# EAGLE board USB-FTDI-ESPmulti (EAGLE 9.6.0)
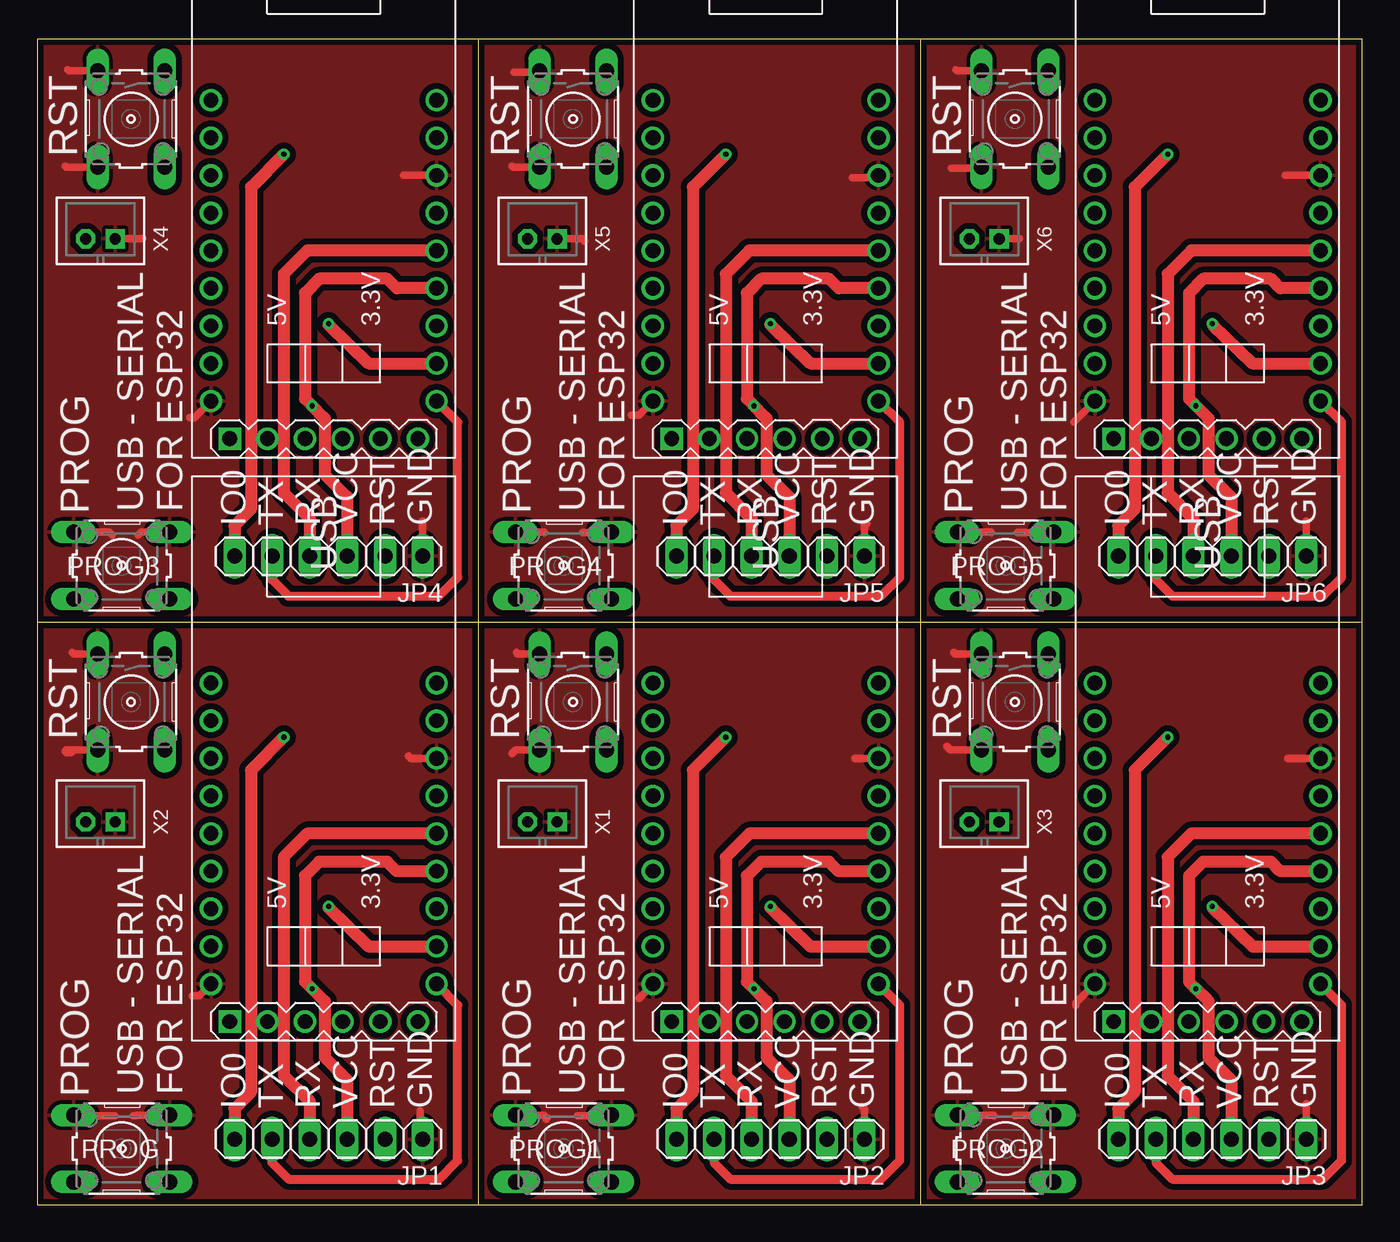
[diagram p0: board, top side]
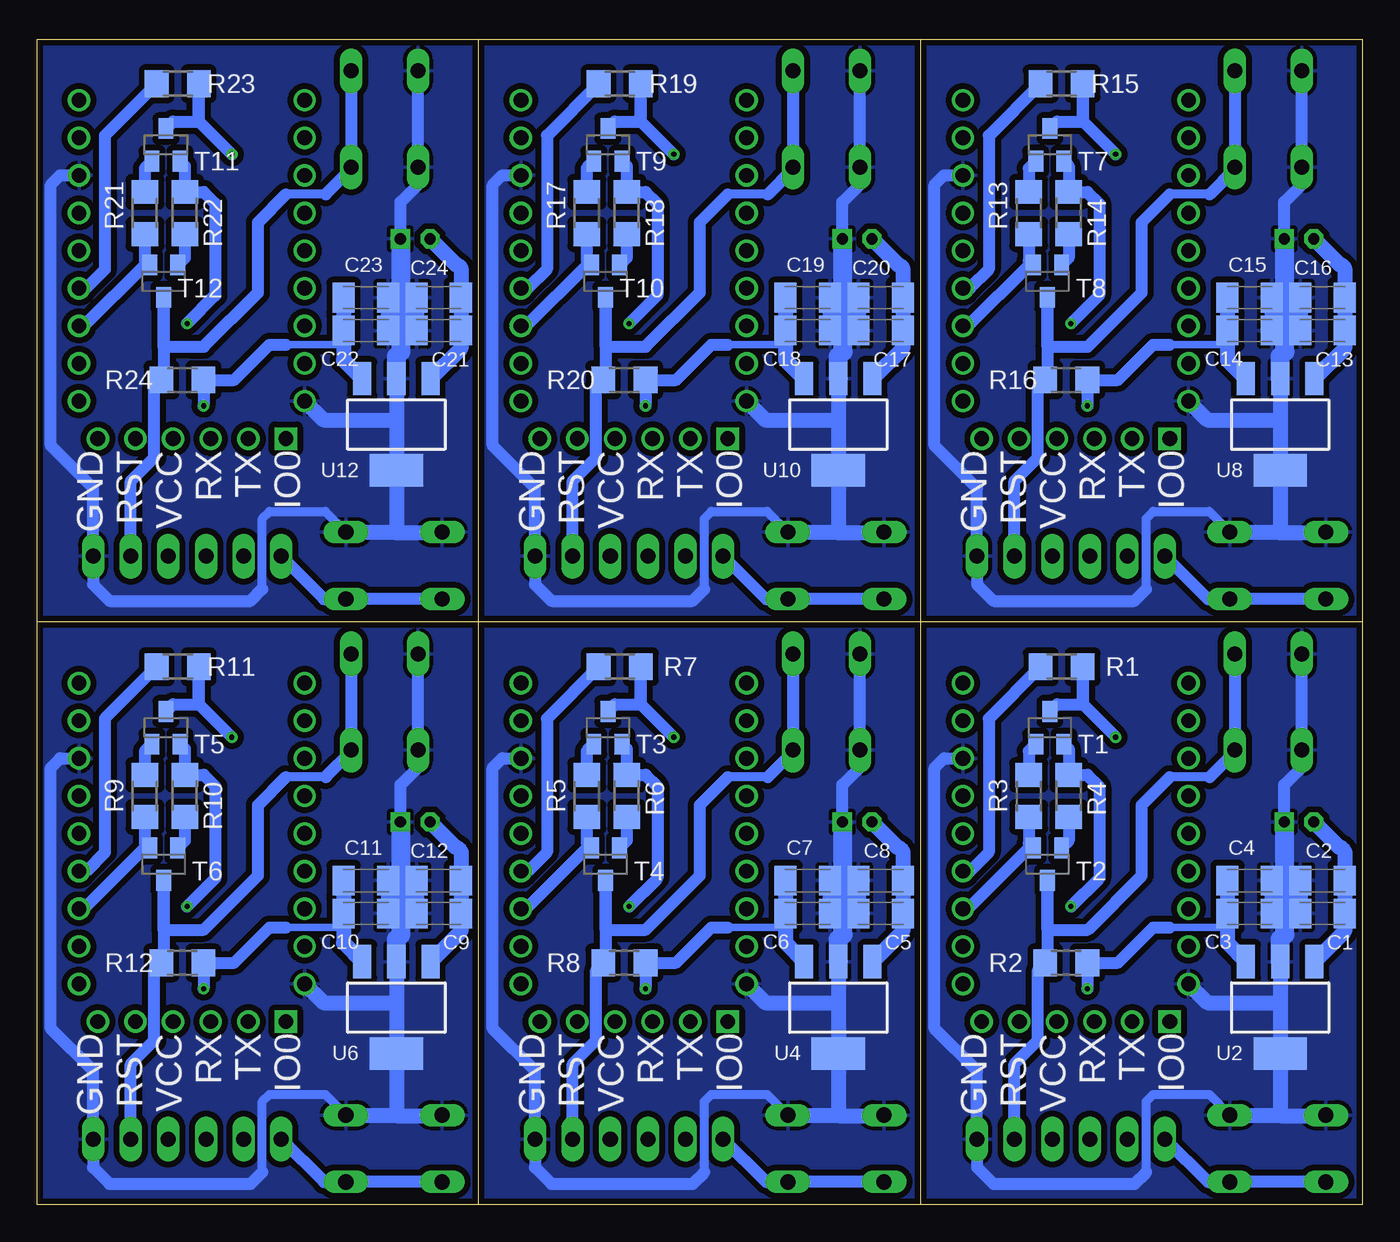
[diagram p1: board, bottom side, seen from below]

Size 89.52 x 78.73 mm. Coordinates in mm from the lower left corner, seen from the top.
Outline: 29.84,0 29.84,78.73
Outline: 59.68,0 59.68,78.73
Outline: 0,39.36 89.52,39.36
Outline: 0,78.73 0,0 89.52,0 89.52,78.73 0,78.73
Copper layers (1*16): Top 0.035mm / dielectric 1.5mm / Bottom 0.035mm
Design rules "default *": minimum track width 6mil, minimum drill 0.35mm, track to track 6mil, track to pad 6mil, pad to pad 6mil, via to via 6mil, smd to smd 6mil, copper to edge 6mil, drill to drill 6mil, minimum pad ring 10mil, minimum via ring 8mil, stop-mask expansion 4mil, vias tented up to drill 0mil, thermal gap 10mil

## Footprints (pad centres in the part's own frame; a part is rotated, then mirrored left to right if it is on the bottom)
C1206K = smd 1.5 x 2: 1 -1.5,0; 2 1.5,0
1X06 = drill 1.016 long: 1 -6.35,0; 2 -3.81,0; 3 -1.27,0; 4 1.27,0; 5 3.81,0; 6 6.35,0
B3F-10XX = drill 1.016 long: 1 -3.251,2.261; 2 3.251,2.261; 3 -3.251,-2.261; 4 3.251,-2.261
R1206 = smd 1.6 x 1.803: 1 -1.422,0; 2 1.422,0
SOT23-BEC = smd 1 x 1.4: B -0.95,-1.1; C 0,1.1; E 0.95,-1.1
USB-SERIAL-FT232R-3.3-5 = drill 1: 3.3 -8.89,7.62; 5V -11.43,7.62; CTS -6.35,7.62; CTS2 -21.59,-3.81; DCD 1.27,-7.62; DSR -1.27,-7.62; DTR -16.51,-7.62; GND -3.81,-7.62; GND2 -21.59,-6.35; GND3 -19.05,7.62; PWREN 1.27,7.62; RI -6.35,-7.62; RTS -13.97,-7.62; RX -8.89,-7.62; RX2 -21.59,3.81; RXL -13.97,7.62; SLEEP -3.81,7.62; TX -19.05,-7.62; TX2 -21.59,1.27; TXDEN -1.27,7.62; TXL -16.51,7.62; VCC -11.43,-7.62; VCC2 -21.59,-1.27 | drill 1 square: DTR2 -21.59,6.35
SOT223 = smd 1.219 x 2.235: 1 -2.311,-3.099; 2 0,-3.099; 3 2.311,-3.099 | smd 3.6 x 2.2: 4 0,3.099
B2B-PH-K-S = drill 0.75 pad 1.3 square: 1 1,0 | drill 0.75 pad 1.3 octagon: 2 -1,0

## Placement (x,y rotation side)
C1  [C1206K]  2.7,19.68 180 bottom
C2  [C1206K]  2.7,21.91 180 bottom
C3  [C1206K]  7.62,19.68 0 bottom
C4  [C1206K]  7.62,21.91 0 bottom
C5  [C1206K]  32.54,19.68 180 bottom
C6  [C1206K]  37.47,19.68 0 bottom
C7  [C1206K]  37.47,21.91 0 bottom
C8  [C1206K]  32.54,21.91 180 bottom
C9  [C1206K]  62.39,19.68 180 bottom
C10  [C1206K]  67.31,19.68 0 bottom
C11  [C1206K]  67.31,21.91 0 bottom
C12  [C1206K]  62.39,21.91 180 bottom
C13  [C1206K]  2.7,59.05 180 bottom
C14  [C1206K]  7.62,59.05 0 bottom
C15  [C1206K]  7.62,61.28 0 bottom
C16  [C1206K]  2.7,61.28 180 bottom
C17  [C1206K]  32.54,59.05 180 bottom
C18  [C1206K]  37.47,59.05 0 bottom
C19  [C1206K]  37.47,61.28 0 bottom
C20  [C1206K]  32.54,61.28 180 bottom
C21  [C1206K]  62.39,59.05 180 bottom
C22  [C1206K]  67.31,59.05 0 bottom
C23  [C1206K]  67.31,61.28 0 bottom
C24  [C1206K]  62.39,61.28 180 bottom
JP1  [1X06]  19.68,4.45 180 top
JP2  [1X06]  49.53,4.45 180 top
JP3  [1X06]  79.38,4.45 180 top
JP4  [1X06]  19.68,43.81 180 top
JP5  [1X06]  49.53,43.81 180 top
JP6  [1X06]  79.38,43.81 180 top
PROG  [B3F-10XX]  5.71,3.81 180 top
PROG1  [B3F-10XX]  35.56,3.81 180 top
PROG2  [B3F-10XX]  65.41,3.81 180 top
PROG3  [B3F-10XX]  5.71,43.18 180 top
PROG4  [B3F-10XX]  35.56,43.18 180 top
PROG5  [B3F-10XX]  65.41,43.18 180 top
R1  100k  [R1206]  20.32,36.35 180 bottom
R2  100k  [R1206]  20,16.35 0 bottom
R3  10k  [R1206]  22.54,27.62 90 bottom
R4  10k  [R1206]  19.84,27.62 270 bottom
R5  10k  [R1206]  52.39,27.62 90 bottom
R6  10k  [R1206]  49.69,27.62 270 bottom
R7  100k  [R1206]  50.16,36.35 180 bottom
R8  100k  [R1206]  49.85,16.35 0 bottom
R9  10k  [R1206]  82.23,27.62 90 bottom
R10  10k  [R1206]  79.53,27.62 270 bottom
R11  100k  [R1206]  80.01,36.35 180 bottom
R12  100k  [R1206]  79.69,16.35 0 bottom
R13  10k  [R1206]  22.54,66.99 90 bottom
R14  10k  [R1206]  19.84,66.99 270 bottom
R15  100k  [R1206]  20.32,75.72 180 bottom
R16  100k  [R1206]  20,55.72 0 bottom
R17  10k  [R1206]  52.39,66.99 90 bottom
R18  10k  [R1206]  49.69,66.99 270 bottom
R19  100k  [R1206]  50.16,75.72 180 bottom
R20  100k  [R1206]  49.85,55.72 0 bottom
R21  10k  [R1206]  82.23,66.99 90 bottom
R22  10k  [R1206]  79.53,66.99 270 bottom
R23  100k  [R1206]  80.01,75.72 180 bottom
R24  100k  [R1206]  79.69,55.72 0 bottom
RST  [B3F-10XX]  6.35,33.97 270 top
RST1  [B3F-10XX]  36.2,33.97 270 top
RST2  [B3F-10XX]  66.04,33.97 270 top
RST3  [B3F-10XX]  6.35,73.34 270 top
RST4  [B3F-10XX]  36.2,73.34 270 top
RST5  [B3F-10XX]  66.04,73.34 270 top
T1  2222  [SOT23-BEC]  21.11,32.23 0 bottom
T2  2222  [SOT23-BEC]  21.27,23.02 180 bottom
T3  2222  [SOT23-BEC]  50.96,32.23 0 bottom
T4  2222  [SOT23-BEC]  51.12,23.02 180 bottom
T5  2222  [SOT23-BEC]  80.8,32.23 0 bottom
T6  2222  [SOT23-BEC]  80.96,23.02 180 bottom
T7  2222  [SOT23-BEC]  21.11,71.6 0 bottom
T8  2222  [SOT23-BEC]  21.27,62.39 180 bottom
T9  2222  [SOT23-BEC]  50.96,71.6 0 bottom
T10  2222  [SOT23-BEC]  51.12,62.39 180 bottom
T11  2222  [SOT23-BEC]  80.8,71.6 0 bottom
T12  2222  [SOT23-BEC]  80.96,62.39 180 bottom
U1  USB-SERIAL-FT232R-3.3-5  [USB-SERIAL-FT232R-3.3-5]  19.37,33.97 90 top
U2  MIC5239S  [SOT223]  5.56,13.34 180 bottom
U3  USB-SERIAL-FT232R-3.3-5  [USB-SERIAL-FT232R-3.3-5]  49.21,33.97 90 top
U4  MIC5239S  [SOT223]  35.4,13.34 180 bottom
U5  USB-SERIAL-FT232R-3.3-5  [USB-SERIAL-FT232R-3.3-5]  79.06,33.97 90 top
U6  MIC5239S  [SOT223]  65.25,13.34 180 bottom
U7  USB-SERIAL-FT232R-3.3-5  [USB-SERIAL-FT232R-3.3-5]  19.37,73.34 90 top
U8  MIC5239S  [SOT223]  5.56,52.7 180 bottom
U9  USB-SERIAL-FT232R-3.3-5  [USB-SERIAL-FT232R-3.3-5]  49.21,73.34 90 top
U10  MIC5239S  [SOT223]  35.4,52.7 180 bottom
U11  USB-SERIAL-FT232R-3.3-5  [USB-SERIAL-FT232R-3.3-5]  79.06,73.34 90 top
U12  MIC5239S  [SOT223]  65.25,52.7 180 bottom
X1  B2B-PH-K-S  [B2B-PH-K-S]  34.13,25.88 0 top
X2  B2B-PH-K-S  [B2B-PH-K-S]  4.29,25.88 0 top
X3  B2B-PH-K-S  [B2B-PH-K-S]  63.98,25.88 0 top
X4  B2B-PH-K-S  [B2B-PH-K-S]  4.29,65.25 0 top
X5  B2B-PH-K-S  [B2B-PH-K-S]  34.13,65.25 0 top
X6  B2B-PH-K-S  [B2B-PH-K-S]  63.98,65.25 0 top

## Library data of the parts
C1-C24 = rcl; SPICEPREFIX: C
JP1-JP6 = pinhead
PROG PROG1-PROG5 RST RST1-RST5 = switch-omron; MPN: B3F-1000; OC_FARNELL: 176432; OC_NEWARK: 36M3542
R1-R24 = eagle-ltspice; SPICEMODEL: NONE; SPICEPREFIX: R
T1-T12 = transistor
U1 U3 U5 U7 U9 U11 = diy-modules1.8-perso
U2 U4 U6 U8 U10 U12 = micrel
X1-X6 = con-JST PH

## Nets
DTR: R4.1 T1.E U1.DTR
DTR1: R6.1 T3.E U3.DTR
DTR2: R10.1 T5.E U5.DTR
DTR3: R14.1 T7.E U7.DTR
DTR4: R18.1 T9.E U9.DTR
DTR5: R22.1 T11.E U11.DTR
GND: C1.2 C2.2 C3.2 C4.2 JP1.1 PROG.3 PROG.4 RST.3 RST.4 U1.GND U1.GND3 U2.2 U2.4 X2.1
GND1: C5.2 C6.2 C7.2 C8.2 JP2.1 PROG1.3 PROG1.4 RST1.3 RST1.4 U3.GND U3.GND3 U4.2 U4.4 X1.1
GND2: C9.2 C10.2 C11.2 C12.2 JP3.1 PROG2.3 PROG2.4 RST2.3 RST2.4 U5.GND U5.GND3 U6.2 U6.4 X3.1
GND3: C13.2 C14.2 C15.2 C16.2 JP4.1 PROG3.3 PROG3.4 RST3.3 RST3.4 U7.GND U7.GND3 U8.2 U8.4 X4.1
GND4: C17.2 C18.2 C19.2 C20.2 JP5.1 PROG4.3 PROG4.4 RST4.3 RST4.4 U9.GND U9.GND3 U10.2 U10.4 X5.1
GND5: C21.2 C22.2 C23.2 C24.2 JP6.1 PROG5.3 PROG5.4 RST5.3 RST5.4 U11.GND U11.GND3 U12.2 U12.4 X6.1
IO0: JP1.6 PROG.1 PROG.2 R1.1 T1.C
IO1: JP2.6 PROG1.1 PROG1.2 R7.1 T3.C
IO2: JP3.6 PROG2.1 PROG2.2 R11.1 T5.C
IO3: JP4.6 PROG3.1 PROG3.2 R15.1 T7.C
IO4: JP5.6 PROG4.1 PROG4.2 R19.1 T9.C
IO5: JP6.6 PROG5.1 PROG5.2 R23.1 T11.C
N$1: C1.1 C2.1 U2.1 X2.2
N$2: R5.2 T3.B
N$3: R6.2 T4.B
N$4: C5.1 C8.1 U4.1 X1.2
N$5: R9.2 T5.B
N$6: R10.2 T6.B
N$7: C9.1 C12.1 U6.1 X3.2
N$8: R13.2 T7.B
N$9: R14.2 T8.B
N$10: R3.2 T1.B
N$11: C13.1 C16.1 U8.1 X4.2
N$12: R17.2 T9.B
N$13: R18.2 T10.B
N$14: R4.2 T2.B
N$15: C17.1 C20.1 U10.1 X5.2
N$16: R21.2 T11.B
N$17: R22.2 T12.B
N$18: C21.1 C24.1 U12.1 X6.2
RST: JP1.2 R2.1 RST.1 RST.2 T2.C
RST1: JP2.2 R8.1 RST1.1 RST1.2 T4.C
RST2: JP3.2 R12.1 RST2.1 RST2.2 T6.C
RST3: JP4.2 R16.1 RST3.1 RST3.2 T8.C
RST4: JP5.2 R20.1 RST4.1 RST4.2 T10.C
RST5: JP6.2 R24.1 RST5.1 RST5.2 T12.C
RTS: R3.1 T2.E U1.RTS
RTS1: R5.1 T4.E U3.RTS
RTS2: R9.1 T6.E U5.RTS
RTS3: R13.1 T8.E U7.RTS
RTS4: R17.1 T10.E U9.RTS
RTS5: R21.1 T12.E U11.RTS
RX: JP1.4 U1.RX
RX1: JP2.4 U3.RX
RX2: JP3.4 U5.RX
RX3: JP4.4 U7.RX
RX4: JP5.4 U9.RX
RX5: JP6.4 U11.RX
TX: JP1.5 U1.TX
TX1: JP2.5 U3.TX
TX2: JP3.5 U5.TX
TX3: JP4.5 U7.TX
TX4: JP5.5 U9.TX
TX5: JP6.5 U11.TX
VCC: C3.1 C4.1 JP1.3 R1.2 R2.2 U1.VCC U2.3
VCC1: C6.1 C7.1 JP2.3 R7.2 R8.2 U3.VCC U4.3
VCC2: U1.VCC2
VCC3: U3.VCC2
VCC4: C10.1 C11.1 JP3.3 R11.2 R12.2 U5.VCC U6.3
VCC5: U5.VCC2
VCC6: C14.1 C15.1 JP4.3 R15.2 R16.2 U7.VCC U8.3
VCC7: U7.VCC2
VCC8: C18.1 C19.1 JP5.3 R19.2 R20.2 U9.VCC U10.3
VCC9: U9.VCC2
VCC10: C22.1 C23.1 JP6.3 R23.2 R24.2 U11.VCC U12.3
VCC11: U11.VCC2

## Tracks (layer width: path | path; a pad name or v marks a point on that pad's centre or on a via)
DTR  (via drill 0.35)
  Top 0.152: v19.68,20.16 19.68,20.09 | 19.68,20.09
  Top 0.813: 19.68,20.09 22.41,17.46 U1.DTR
  Bottom 0.813: T1.E 19.84,30.81 R4.1 18.57,29.04 17.78,28.26 17.78,22.07 v19.68,20.16
DTR1  (via drill 0.35)
  Top 0.152: v49.53,20.16 49.53,20.09 | 49.53,20.09
  Top 0.813: 49.53,20.09 52.25,17.46 U3.DTR
  Bottom 0.813: T3.E 49.69,30.81 R6.1 48.41,29.04 47.62,28.26 47.62,22.07 v49.53,20.16
DTR2  (via drill 0.35)
  Top 0.152: v79.38,20.16 79.38,20.09 | 79.38,20.09
  Top 0.813: 79.38,20.09 82.1,17.46 U5.DTR
  Bottom 0.813: T5.E 79.53,30.81 R10.1 78.26,29.04 77.47,28.26 77.47,22.07 v79.38,20.16
DTR3  (via drill 0.35)
  Top 0.152: v19.68,59.53 19.68,59.46 | 19.68,59.46
  Top 0.813: 19.68,59.46 22.41,56.83 U7.DTR
  Bottom 0.813: T7.E 19.84,70.18 R14.1 18.57,68.42 17.78,67.63 17.78,61.44 v19.68,59.53
DTR4  (via drill 0.35)
  Top 0.152: v49.53,59.53 49.53,59.46 | 49.53,59.46
  Top 0.813: 49.53,59.46 52.25,56.83 U9.DTR
  Bottom 0.813: T9.E 49.69,70.18 R18.1 48.41,68.42 47.62,67.63 47.62,61.44 v49.53,59.53
DTR5  (via drill 0.35)
  Top 0.152: v79.38,59.53 79.38,59.46 | 79.38,59.46
  Top 0.813: 79.38,59.46 82.1,56.83 U11.DTR
  Bottom 0.813: T11.E 79.53,70.18 R22.1 78.26,68.42 77.47,67.63 77.47,61.44 v79.38,59.53
GND
  Top 0.508: RST.3 2.46,37.22 2.38,37.31 | RST.4 1.99,30.72 1.91,30.64 1.98,30.56 2.3,30.56 2.38,30.64 | U1.GND 25.24,30.16 25.08,30.32 | U1.GND3 10.95,14.13 10.48,14.13 | PROG.4 2.5,6.03 5.24,6.03 | PROG.3 6.71,6.07 6.67,6.03 6.51,6.03 | JP1.1 25.88,4.6 25.88,6.35
  Bottom 0.61: 14.61,2.22 14.61,6.99 14.13,7.46 10.36,7.46 8.93,6.03
  Bottom 0.813: C3.2 5.96,19.53 5.24,19.53 5.08,19.68 C1.2 | C4.2 5.24,21.91 C2.2 | X2.1 5.29,28.37 3.97,29.69 3.97,30.6 RST.4 RST.3 | 14.61,2.22 15.4,1.43 24.92,1.43 26.04,2.54 JP1.1 26.04,9.05 28.89,11.91 28.89,29.53 28.26,30.16 U1.GND
  Bottom 1.016: C2.2 C1.2 | C4.2 C3.2 | U2.2 5.56,13.65 | 5.56,13.65 U2.4 5.56,6.03 | U1.GND3 10.48,13.65 5.56,13.65 | 5.56,6.03 2.5,6.03 PROG.4 | 5.56,6.03 8.93,6.03 PROG.3
  Bottom 1.27: U2.2 5.56,17.94 5.24,18.26 5.24,19.53 5.24,21.91 5.24,25.83 X2.1
  pour Top (isolate 0.406): 0,39.37 29.84,39.37 29.84,0 0,0
  pour Bottom (isolate 0.406): 0,39.37 29.84,39.37 29.84,0 0,0
GND1
  Top 0.508: U3.GND3 40.64,13.97 | RST1.3 32.47,37.22 32.38,37.31 | RST1.4 32.31,30.72 32.07,30.48 | PROG1.4 34.25,6.07 34.45,5.87 34.37,5.79 | PROG1.3 38.77,6.03 36.51,6.03 | JP2.1 55.88,6.51 55.72,6.67 | U3.GND 55.24,30.16
  Bottom 0.61: 44.45,2.22 44.45,6.99 43.97,7.46 40.2,7.46 38.77,6.03
  Bottom 0.813: C6.2 35.81,19.53 35.08,19.53 34.92,19.68 C5.2 | C7.2 35.08,21.91 C8.2 | X1.1 35.13,28.37 33.81,29.69 33.81,30.6 RST1.4 RST1.3 | 44.45,2.22 45.24,1.43 54.77,1.43 55.88,2.54 JP2.1 55.88,9.05 58.74,11.91 58.74,29.53 58.1,30.16 U3.GND
  Bottom 1.016: C8.2 C5.2 | C7.2 C6.2 | U4.2 35.4,13.65 | 35.4,13.65 U4.4 35.4,6.03 | U3.GND3 40.32,13.65 35.4,13.65 | 35.4,6.03 32.35,6.03 PROG1.4 | 35.4,6.03 38.77,6.03 PROG1.3
  Bottom 1.27: U4.2 35.4,17.94 35.08,18.26 35.08,19.53 35.08,21.91 35.08,25.83 X1.1
  pour Top (isolate 0.406): 29.84,39.37 59.69,39.37 59.69,0 29.84,0
  pour Bottom (isolate 0.406): 29.84,39.37 59.69,39.37 59.69,0 29.84,0
GND2
  Top 0.508: RST2.3 61.99,37.22 61.91,37.31 | RST2.4 61.67,30.72 61.44,30.96 | U5.GND3 70.17,13.65 70.17,13.49 | 63.66,5.87 63.46,6.07 PROG2.4 64.57,6.07 64.61,6.03 | PROG2.3 66.08,6.07 66.04,6.03 | U5.GND 84.45,30.16 | JP3.1 85.72,6.83
  Bottom 0.61: 74.3,2.22 74.3,6.99 73.82,7.46 70.05,7.46 68.62,6.03
  Bottom 0.813: C10.2 65.65,19.53 64.93,19.53 64.77,19.68 C9.2 | C11.2 64.93,21.91 C12.2 | X3.1 64.98,28.37 63.66,29.69 63.66,30.6 RST2.4 RST2.3 | 74.3,2.22 75.09,1.43 84.61,1.43 85.72,2.54 JP3.1 85.72,9.05 88.58,11.91 88.58,29.53 87.95,30.16 U5.GND
  Bottom 1.016: C12.2 C9.2 | C11.2 C10.2 | U6.2 65.25,13.65 | 65.25,13.65 U6.4 65.25,6.03 | U5.GND3 70.17,13.65 65.25,13.65 | 65.25,6.03 62.19,6.03 PROG2.4 | 65.25,6.03 68.62,6.03 PROG2.3
  Bottom 1.27: U6.2 65.25,17.94 64.93,18.26 64.93,19.53 64.93,21.91 64.93,25.83 X3.1
  pour Top (isolate 0.406): 59.69,39.37 89.53,39.37 89.53,0 59.69,0
  pour Bottom (isolate 0.406): 59.69,39.37 89.53,39.37 89.53,0 59.69,0
GND3
  Top 0.508: RST3.3 2.15,76.59 2.06,76.68 | RST3.4 1.98,70.09 1.91,70.17 | U7.GND 24.77,69.53 | PROG3.4 4.88,45.44 5.08,45.24 | PROG3.3 7.02,45.44 6.83,45.24 | U7.GND3 10.64,53.18 10.32,53.18 | JP4.1 26.04,46.2 | X4.1 7.14,65.25
  Bottom 0.61: 14.61,41.59 14.61,46.35 14.13,46.83 10.36,46.83 8.93,45.4
  Bottom 0.813: C14.2 5.96,58.9 5.24,58.9 5.08,59.05 C13.2 | C15.2 5.24,61.28 C16.2 | X4.1 5.29,67.74 3.97,69.06 3.97,69.97 RST3.4 RST3.3 | 14.61,41.59 15.4,40.8 24.92,40.8 26.04,41.91 JP4.1 26.04,48.42 28.89,51.28 28.89,68.9 28.26,69.53 U7.GND
  Bottom 1.016: C16.2 C13.2 | C15.2 C14.2 | U8.2 5.56,53.02 | 5.56,53.02 U8.4 5.56,45.4 | U7.GND3 10.48,53.02 5.56,53.02 | 5.56,45.4 2.5,45.4 PROG3.4 | 5.56,45.4 8.93,45.4 PROG3.3
  Bottom 1.27: U8.2 5.56,57.31 5.24,57.63 5.24,58.9 5.24,61.28 5.24,65.2 X4.1
  pour Top (isolate 0.406): 0,78.74 29.84,78.74 29.84,39.37 0,39.37
  pour Bottom (isolate 0.406): 0,78.74 29.84,78.74 29.84,39.37 0,39.37
GND4
  Top 0.508: RST4.3 33.86,76.52 32.23,76.52 | RST4.4 32.14,70.09 32.07,70.17 | X5.1 36.83,65.25 36.99,65.09 | U9.GND 56.67,69.37 55.09,69.37 | PROG4.4 34.25,45.44 34.29,45.4 | PROG4.3 38.77,45.4 36.83,45.4 | JP5.1 55.88,45.88 56.04,46.04 | U9.GND3 40.64,53.34 40.16,53.34
  Bottom 0.61: 44.45,41.59 44.45,46.35 43.97,46.83 40.2,46.83 38.77,45.4
  Bottom 0.813: C18.2 35.81,58.9 35.08,58.9 34.92,59.05 C17.2 | C19.2 35.08,61.28 C20.2 | X5.1 35.13,67.74 33.81,69.06 33.81,69.97 RST4.4 RST4.3 | 44.45,41.59 45.24,40.8 54.77,40.8 55.88,41.91 JP5.1 55.88,48.42 58.74,51.28 58.74,68.9 58.1,69.53 U9.GND
  Bottom 1.016: C20.2 C17.2 | C19.2 C18.2 | U10.2 35.4,53.02 | 35.4,53.02 U10.4 35.4,45.4 | U9.GND3 40.32,53.02 35.4,53.02 | 35.4,45.4 32.35,45.4 PROG4.4 | 35.4,45.4 38.77,45.4 PROG4.3
  Bottom 1.27: U10.2 35.4,57.31 35.08,57.63 35.08,58.9 35.08,61.28 35.08,65.2 X5.1
  pour Top (isolate 0.406): 29.84,78.74 59.69,78.74 59.69,39.37 29.84,39.37
  pour Bottom (isolate 0.406): 29.84,78.74 59.69,78.74 59.69,39.37 29.84,39.37
GND5
  Top 0.508: RST5.4 63.7,70.01 61.75,70.01 | RST5.3 62.15,76.59 62.07,76.68 | X6.1 66.36,65.25 | U11.GND 84.3,69.53 | JP6.1 85.72,46.2 | PROG5.3 68.62,45.4 66.2,45.4 | PROG5.4 64.41,45.44 64.45,45.4 | U11.GND3 70.01,52.86
  Bottom 0.61: 74.3,41.59 74.3,46.35 73.82,46.83 70.05,46.83 68.62,45.4
  Bottom 0.813: C22.2 65.65,58.9 64.93,58.9 64.77,59.05 C21.2 | C23.2 64.93,61.28 C24.2 | X6.1 64.98,67.74 63.66,69.06 63.66,69.97 RST5.4 RST5.3 | 74.3,41.59 75.09,40.8 84.61,40.8 85.72,41.91 JP6.1 85.72,48.42 88.58,51.28 88.58,68.9 87.95,69.53 U11.GND
  Bottom 1.016: C24.2 C21.2 | C23.2 C22.2 | U12.2 65.25,53.02 | 65.25,53.02 U12.4 65.25,45.4 | U11.GND3 70.17,53.02 65.25,53.02 | 65.25,45.4 62.19,45.4 PROG5.4 | 65.25,45.4 68.62,45.4 PROG5.3
  Bottom 1.27: U12.2 65.25,57.31 64.93,57.63 64.93,58.9 64.93,61.28 64.93,65.2 X6.1
  pour Top (isolate 0.406): 59.69,78.74 89.53,78.74 89.53,39.37 59.69,39.37
  pour Bottom (isolate 0.406): 59.69,78.74 89.53,78.74 89.53,39.37 59.69,39.37
IO0  (via drill 0.35)
  Top 0.813: v16.67,31.59 14.45,29.37 14.45,7.62 13.34,6.51 JP1.6
  Bottom 0.813: T1.C 20.64,33.8 18.9,33.8 R1.1 18.9,33.82 v16.67,31.59 | PROG.2 PROG.1 10.44,1.55 JP1.6
IO1  (via drill 0.35)
  Top 0.813: v46.51,31.59 44.29,29.37 44.29,7.62 43.18,6.51 JP2.6
  Bottom 0.813: T3.C 50.48,33.8 48.74,33.8 R7.1 48.74,33.82 v46.51,31.59 | PROG1.2 PROG1.1 40.28,1.55 JP2.6
IO2  (via drill 0.35)
  Top 0.813: v76.36,31.59 74.14,29.37 74.14,7.62 73.03,6.51 JP3.6
  Bottom 0.813: T5.C 80.33,33.8 78.59,33.8 R11.1 78.59,33.82 v76.36,31.59 | PROG2.2 PROG2.1 70.13,1.55 JP3.6
IO3  (via drill 0.35)
  Top 0.813: v16.67,70.96 14.45,68.74 14.45,46.99 13.34,45.88 JP4.6
  Bottom 0.813: T7.C 20.64,73.17 18.9,73.17 R15.1 18.9,73.19 v16.67,70.96 | PROG3.2 PROG3.1 10.44,40.92 JP4.6
IO4  (via drill 0.35)
  Top 0.813: v46.51,70.96 44.29,68.74 44.29,46.99 43.18,45.88 JP5.6
  Bottom 0.813: T9.C 50.48,73.17 48.74,73.17 R19.1 48.74,73.19 v46.51,70.96 | PROG4.2 PROG4.1 40.28,40.92 JP5.6
IO5  (via drill 0.35)
  Top 0.813: v76.36,70.96 74.14,68.74 74.14,46.99 73.03,45.88 JP6.6
  Bottom 0.813: T11.C 80.33,73.17 78.59,73.17 R23.1 78.59,73.19 v76.36,70.96 | PROG5.2 PROG5.1 70.13,40.92 JP6.6
N$1
  Bottom 1.016: X2.2 1.54,24.13 1.43,24.13 1.2,23.9 C2.1 C1.1 1.2,18.48 U2.1
N$2
  Bottom 0.813: T3.B 52.39,30.65 R5.2
N$3
  Bottom 0.813: R6.2 49.69,24.6 T4.B
N$4
  Bottom 1.016: X1.2 31.39,24.13 31.27,24.13 31.04,23.9 C8.1 C5.1 31.04,18.48 U4.1
N$5
  Bottom 0.813: T5.B 82.23,30.65 R9.2
N$6
  Bottom 0.813: R10.2 79.53,24.6 T6.B
N$7
  Bottom 1.016: X3.2 61.23,24.13 61.12,24.13 60.89,23.9 C12.1 C9.1 60.89,18.48 U6.1
N$8
  Bottom 0.813: T7.B 22.54,70.02 R13.2
N$9
  Bottom 0.813: R14.2 19.84,63.97 T8.B
N$10
  Bottom 0.813: T1.B 22.54,30.65 R3.2
N$11
  Bottom 1.016: X4.2 1.54,63.5 1.43,63.5 1.2,63.27 C16.1 C13.1 1.2,57.85 U8.1
N$12
  Bottom 0.813: T9.B 52.39,70.02 R17.2
N$13
  Bottom 0.813: R18.2 49.69,63.97 T10.B
N$14
  Bottom 0.813: R4.2 19.84,24.6 T2.B
N$15
  Bottom 1.016: X5.2 31.39,63.5 31.27,63.5 31.04,63.27 C20.1 C17.1 31.04,57.85 U10.1
N$16
  Bottom 0.813: T11.B 82.23,70.02 R21.2
N$17
  Bottom 0.813: R22.2 79.53,63.97 T12.B
N$18
  Bottom 1.016: X6.2 61.23,63.5 61.12,63.5 60.89,63.27 C24.1 C21.1 60.89,57.85 U12.1
RST
  Bottom 0.61: 10.32,28.89 13.02,28.89 | 21.91,15.88 21.43,16.35 R2.1
  Bottom 0.813: R2.1 21.43,16.36 21.27,16.52 T2.C 21.27,18.59 18.56,18.59 14.92,22.23 14.92,26.99 13.02,28.89 | JP1.2 23.5,9.53 21.91,11.11 21.91,15.88 | RST.1 RST.2 8.61,30.6 10.32,28.89
RST1
  Bottom 0.61: 40.16,28.89 42.86,28.89 | 51.75,15.88 R8.1
  Bottom 0.813: R8.1 51.12,16.52 T4.C 51.12,18.59 48.41,18.59 44.77,22.23 44.77,26.99 42.86,28.89 | JP2.2 53.34,9.53 51.75,11.11 51.75,15.88 | RST1.1 RST1.2 38.46,30.6 40.16,28.89
RST2
  Bottom 0.61: 70.01,28.89 72.71,28.89 | 81.6,15.88 R12.1
  Bottom 0.813: R12.1 81.12,16.36 80.96,16.52 T6.C 80.96,18.59 78.25,18.59 74.61,22.23 74.61,26.99 72.71,28.89 | JP3.2 83.19,9.53 81.6,11.11 81.6,15.88 | RST2.1 RST2.2 68.3,30.6 70.01,28.89
RST3
  Bottom 0.61: 10.32,68.26 13.02,68.26 | 21.91,55.24 21.43,55.72 R16.1
  Bottom 0.813: R16.1 21.43,55.73 21.27,55.89 T8.C 21.27,57.95 18.56,57.95 14.92,61.59 14.92,66.36 13.02,68.26 | JP4.2 23.5,48.9 21.91,50.48 21.91,55.24 | RST3.1 RST3.2 8.61,69.97 10.32,68.26
RST4
  Bottom 0.61: 40.16,68.26 42.86,68.26 | 51.75,55.24 R20.1
  Bottom 0.813: R20.1 51.12,55.89 T10.C 51.12,57.95 48.41,57.95 44.77,61.59 44.77,66.36 42.86,68.26 | JP5.2 53.34,48.9 51.75,50.48 51.75,55.24 | RST4.1 RST4.2 38.46,69.97 40.16,68.26
RST5
  Bottom 0.61: 70.01,68.26 72.71,68.26 | 81.6,55.24 R24.1
  Bottom 0.813: R24.1 81.12,55.73 80.96,55.89 T12.C 80.96,57.95 78.25,57.95 74.61,61.59 74.61,66.36 72.71,68.26 | JP6.2 83.19,48.9 81.6,50.48 81.6,55.24 | RST5.1 RST5.2 68.3,69.97 70.01,68.26
RTS
  Bottom 0.813: R3.1 22.54,24.44 T2.E 22.54,24.12 26.66,20 U1.RTS
RTS1
  Bottom 0.813: R5.1 52.39,24.44 T4.E 52.38,24.12 56.5,20 U3.RTS
RTS2
  Bottom 0.813: R9.1 82.23,24.44 T6.E 82.23,24.12 86.35,20 U5.RTS
RTS3
  Bottom 0.813: R13.1 22.54,63.81 T8.E 22.54,63.49 26.66,59.37 U7.RTS
RTS4
  Bottom 0.813: R17.1 52.39,63.81 T10.E 52.38,63.49 56.5,59.37 U9.RTS
RTS5
  Bottom 0.813: R21.1 82.23,63.81 T12.E 82.23,63.49 86.35,59.37 U11.RTS
RX
  Top 0.813: U1.RX 18.26,25.08 16.67,23.5 16.67,8.73 18.41,6.99 JP1.4
RX1
  Top 0.813: U3.RX 48.1,25.08 46.51,23.5 46.51,8.73 48.26,6.99 JP2.4
RX2
  Top 0.813: U5.RX 77.95,25.08 76.36,23.5 76.36,8.73 78.11,6.99 JP3.4
RX3
  Top 0.813: U7.RX 18.26,64.45 16.67,62.87 16.67,48.1 18.41,46.35 JP4.4
RX4
  Top 0.813: U9.RX 48.1,64.45 46.51,62.87 46.51,48.1 48.26,46.35 JP5.4
RX5
  Top 0.813: U11.RX 77.95,64.45 76.36,62.87 76.36,48.1 78.11,46.35 JP6.4
TX
  Top 0.61: JP1.5 15.88,2.86 16.99,1.75 27.15,1.75 28.42,3.02 28.42,13.49 U1.TX
TX1
  Top 0.61: JP2.5 45.72,2.86 46.83,1.75 56.99,1.75 58.26,3.02 58.26,13.49 U3.TX
TX2
  Top 0.61: JP3.5 75.56,2.86 76.68,1.75 86.84,1.75 88.11,3.02 88.11,13.49 U5.TX
TX3
  Top 0.61: JP4.5 15.88,42.23 16.99,41.12 27.15,41.12 28.42,42.39 28.42,52.86 U7.TX
TX4
  Top 0.61: JP5.5 45.72,42.23 46.83,41.12 56.99,41.12 58.26,42.39 58.26,52.86 U9.TX
TX5
  Top 0.61: JP6.5 75.56,42.23 76.68,41.12 86.84,41.12 88.11,42.39 88.11,52.86 U11.TX
VCC  (via drill 0.35)
  Top 0.61: 19.37,13.81 19.43,13.75
  Top 0.813: U1.VCC 24.29,22.54 23.65,23.18 19.05,23.18 18.1,22.23 18.1,15.08 v18.57,14.61 19.37,13.81 | JP1.3 20.95,8.45 19.43,9.98 19.43,13.75
  Bottom 0.508: 13.02,18.73 9.12,18.73
  Bottom 0.813: 13.02,18.73 14.13,18.73 16.51,16.35 R2.2 v18.58,14.61 v18.57,14.61 | R1.2 25.24,32.85 25.24,23.81 26.51,22.54 U1.VCC
  Bottom 1.016: C4.1 C3.1 9.12,18.73 9.12,17.69 U2.3
VCC1  (via drill 0.35)
  Top 0.61: 49.21,13.81 49.27,13.75
  Top 0.813: U3.VCC 54.13,22.54 53.5,23.18 48.9,23.18 47.94,22.23 47.94,15.08 v48.42,14.61 49.21,13.81 | JP2.3 50.8,8.45 49.27,9.98 49.27,13.75
  Bottom 0.508: 42.86,18.73 38.97,18.73
  Bottom 0.813: 42.86,18.73 43.97,18.73 46.35,16.35 R8.2 v48.42,14.61 | R7.2 55.09,32.85 55.09,23.81 56.36,22.54 U3.VCC
  Bottom 1.016: C7.1 C6.1 38.97,18.73 38.97,17.69 U4.3
VCC4  (via drill 0.35)
  Top 0.61: 79.06,13.81 79.12,13.75
  Top 0.813: U5.VCC 83.98,22.54 83.34,23.18 78.74,23.18 77.79,22.23 77.79,15.08 v78.26,14.61 79.06,13.81 | JP3.3 80.64,8.45 79.12,9.98 79.12,13.75
  Bottom 0.508: 72.71,18.73 68.81,18.73
  Bottom 0.813: 72.71,18.73 73.82,18.73 76.2,16.35 R12.2 v78.27,14.61 v78.26,14.61 | R11.2 84.93,32.85 84.93,23.81 86.2,22.54 U5.VCC
  Bottom 1.016: C11.1 C10.1 68.81,18.73 68.81,17.69 U6.3
VCC6  (via drill 0.35)
  Top 0.61: 19.37,53.18 19.43,53.12
  Top 0.813: U7.VCC 24.29,61.91 23.65,62.55 19.05,62.55 18.1,61.59 18.1,54.45 v18.57,53.98 19.37,53.18 | JP4.3 20.95,47.82 19.43,49.35 19.43,53.12
  Bottom 0.508: 13.02,58.1 9.12,58.1
  Bottom 0.813: 13.02,58.1 14.13,58.1 16.51,55.72 R16.2 v18.58,53.98 v18.57,53.98 | R15.2 25.24,72.22 25.24,63.18 26.51,61.91 U7.VCC
  Bottom 1.016: C15.1 C14.1 9.12,58.1 9.12,57.06 U8.3
VCC8  (via drill 0.35)
  Top 0.61: 49.21,53.18 49.27,53.12
  Top 0.813: U9.VCC 54.13,61.91 53.5,62.55 48.9,62.55 47.94,61.59 47.94,54.45 v48.42,53.98 49.21,53.18 | JP5.3 50.8,47.82 49.27,49.35 49.27,53.12
  Bottom 0.508: 42.86,58.1 38.97,58.1
  Bottom 0.813: 42.86,58.1 43.97,58.1 46.35,55.72 R20.2 v48.42,53.98 | R19.2 55.09,72.22 55.09,63.18 56.36,61.91 U9.VCC
  Bottom 1.016: C19.1 C18.1 38.97,58.1 38.97,57.06 U10.3
VCC10  (via drill 0.35)
  Top 0.61: 79.06,53.18 79.12,53.12
  Top 0.813: U11.VCC 83.98,61.91 83.34,62.55 78.74,62.55 77.79,61.59 77.79,54.45 v78.26,53.98 79.06,53.18 | JP6.3 80.64,47.82 79.12,49.35 79.12,53.12
  Bottom 0.508: 72.71,58.1 68.81,58.1
  Bottom 0.813: 72.71,58.1 73.82,58.1 76.2,55.72 R24.2 v78.27,53.98 v78.26,53.98 | R23.2 84.93,72.22 84.93,63.18 86.2,61.91 U11.VCC
  Bottom 1.016: C23.1 C22.1 68.81,58.1 68.81,57.06 U12.3

## Text on the board
tNames: RST | RST | RST | PROG | USB - SERIAL / FOR ESP32 | PROG | USB - SERIAL / FOR ESP32 | PROG | USB - SERIAL / FOR ESP32 | IO0 / TX / RX / VCC / RST / GND | IO0 / TX / RX / VCC / RST / GND | IO0 / TX / RX / VCC / RST / GND | RST | RST | RST | PROG | USB - SERIAL / FOR ESP32 | IO0 / TX / RX / VCC / RST / GND | PROG | USB - SERIAL / FOR ESP32 | IO0 / TX / RX / VCC / RST / GND | PROG | USB - SERIAL / FOR ESP32 | IO0 / TX / RX / VCC / RST / GND
bNames: GND / RST / VCC / RX / TX / IO0 | GND / RST / VCC / RX / TX / IO0 | GND / RST / VCC / RX / TX / IO0 | GND / RST / VCC / RX / TX / IO0 | GND / RST / VCC / RX / TX / IO0 | GND / RST / VCC / RX / TX / IO0